# Altium PCB cw308_IMXRT1062.PcbDoc
Units mil, origin at the board's own origin, x right, y up, seen from the top; angles counter-clockwise.
Board outline 2055 x 2540 mil, 2 copper layers (Top Layer, Bottom Layer); 35 components, 41 nets, 351 pads, 68 vias.
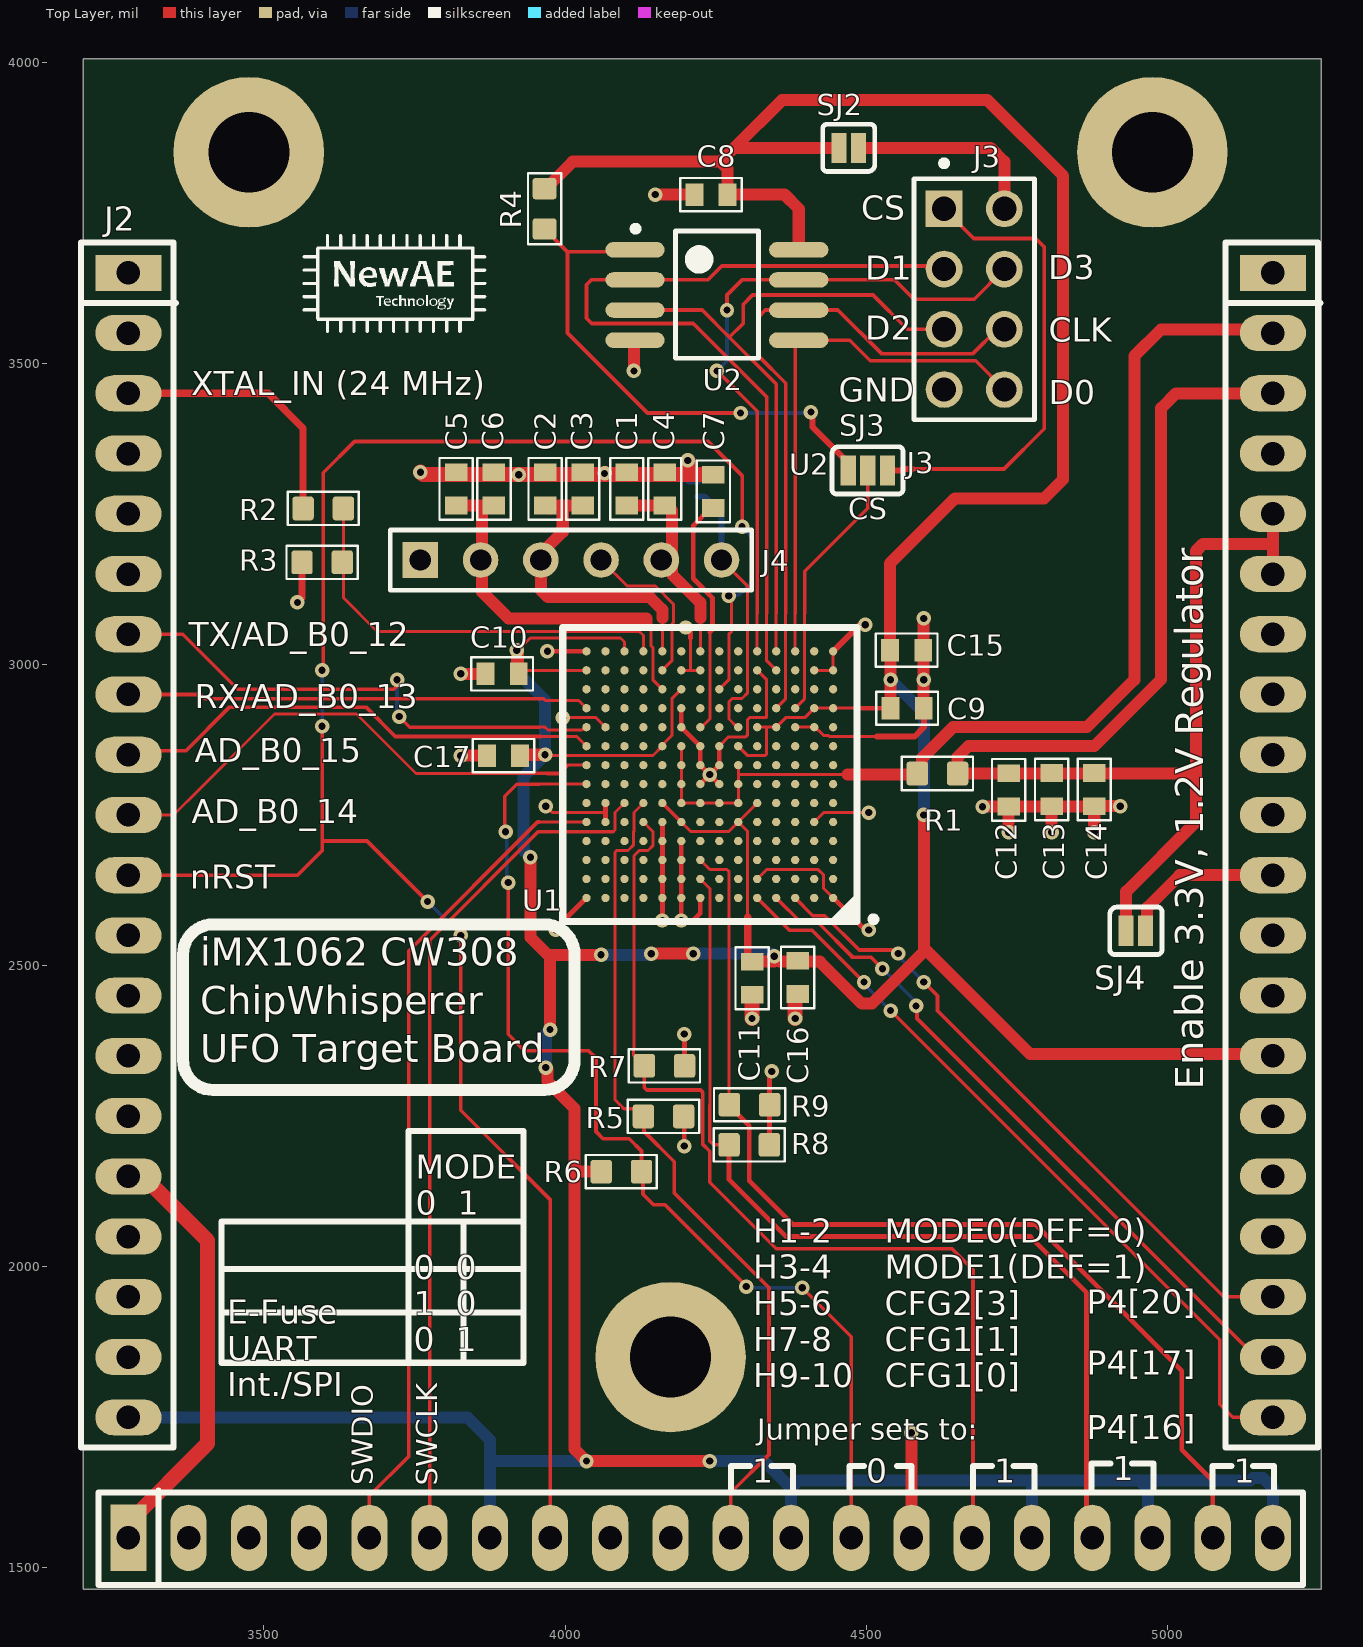
[diagram p0: Top Layer view]
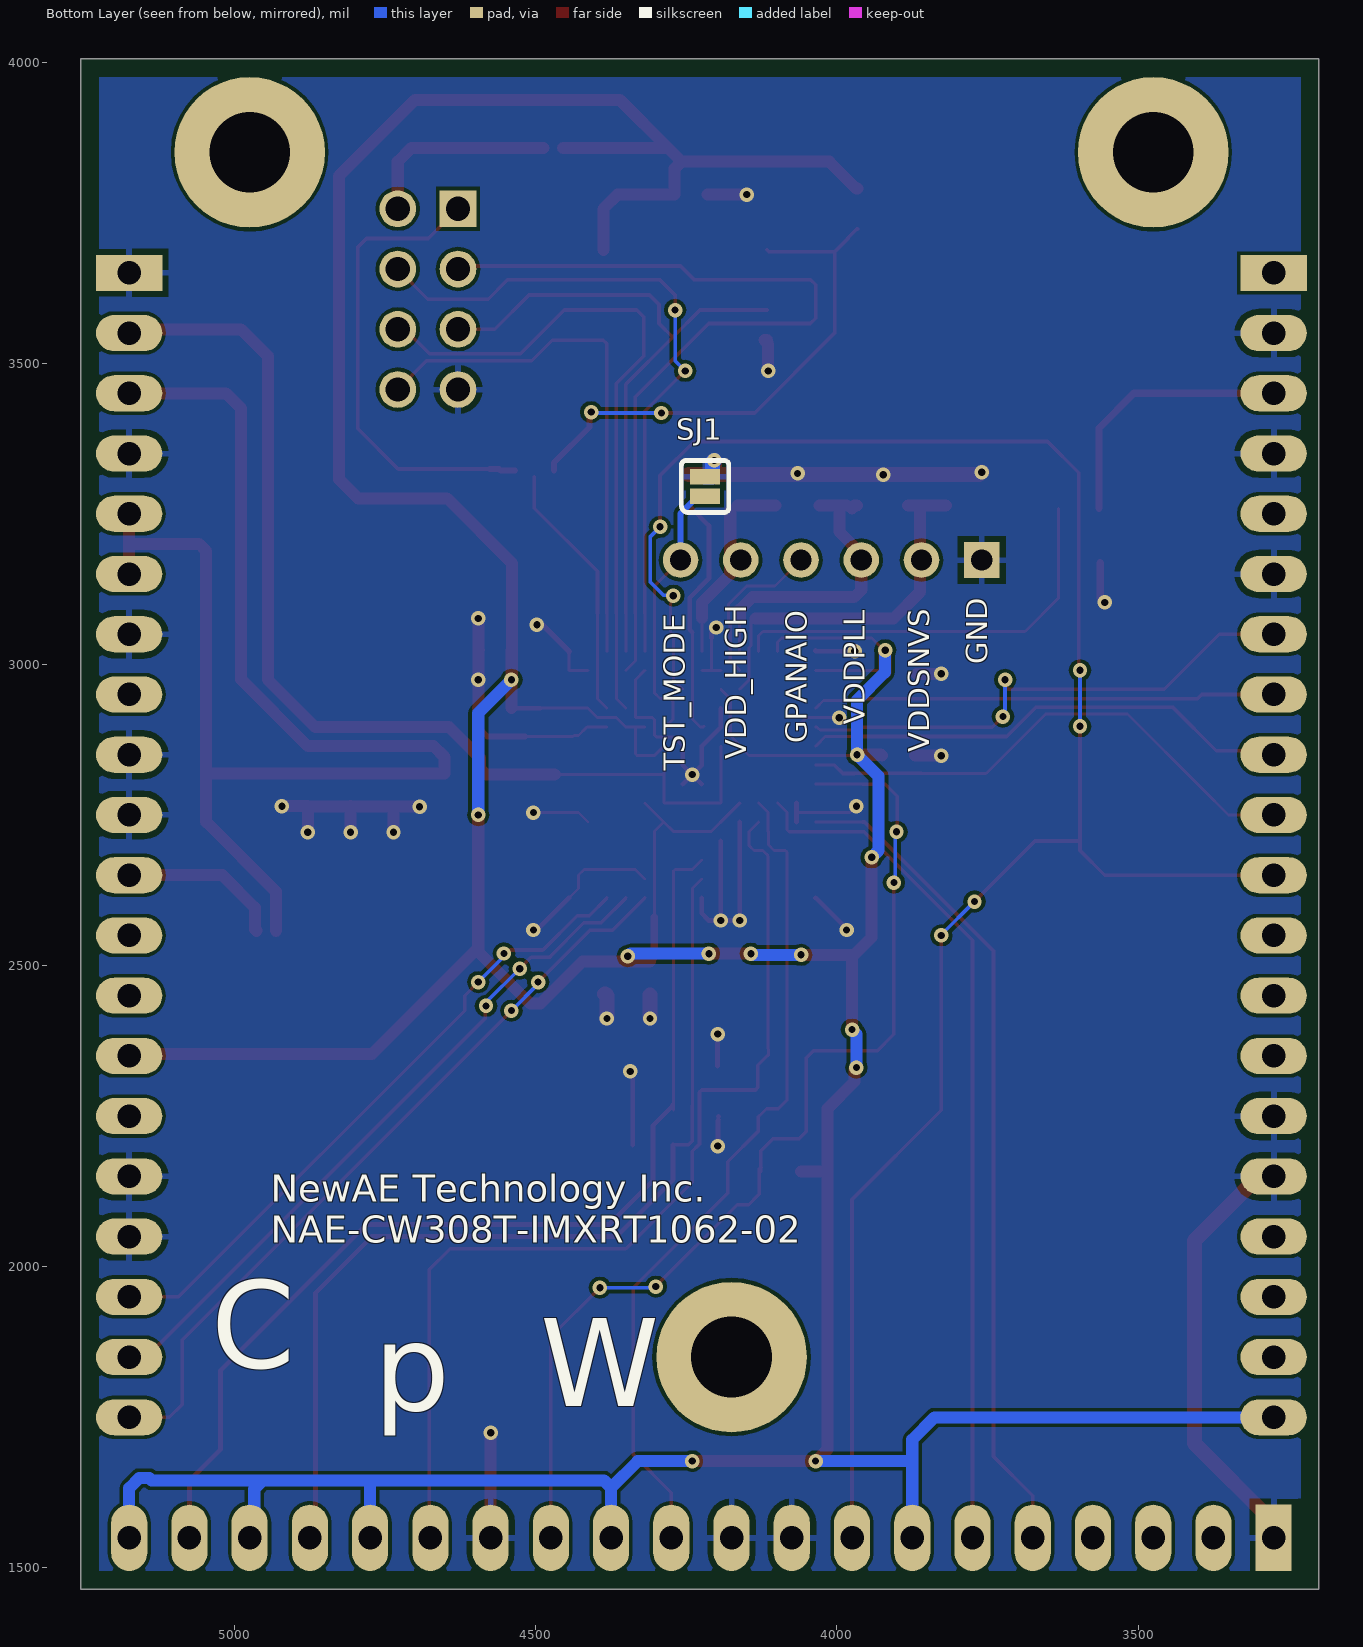
[diagram p1: Bottom Layer view, seen from below]

## Layer stack, top to bottom
Top Solder: solder mask 0.4, Solder Resist, Dk 3.5
Top Layer: signal copper 1.4
Dielectric 1: dielectric 12.6, FR-4, Dk 4.8
Bottom Layer: signal copper 1.4
Bottom Solder: solder mask 0.4, Solder Resist, Dk 3.5

## Board outline
3200,1465 5255,1465 5255,4005 3200,4005

## Design rules (kind name [scope] priority, off if disabled: settings)
BoardOutlineClearance Silk_to_Outline [(OnLayer('Top Overlay'))] p1: gap=0 ignorepadtopadclearanceinfootprint=FALSE
BoardOutlineClearance [All] p2: gap=30 ignorepadtopadclearanceinfootprint=FALSE
Clearance [All] p1: gap=6 ignorepadtopadclearanceinfootprint=FALSE
HoleSize [All] p1: absolutevalues=TRUE maxlimit=200 minlimit=1 maxpercent=80.000 minpercent=20.000
MinimumSolderMaskSliver [All] p1: minsoldermaskwidth=5
PlaneConnect PlaneConnect_viaDirect [IsVia] p1: planeconnectstyle=Direct reliefexpansion=20 reliefentries=4 reliefconductorwidth=10 reliefairgap=10
PlaneConnect [All] p2: planeconnectstyle=Relief reliefexpansion=20 reliefentries=4 reliefconductorwidth=10 reliefairgap=10
PolygonConnect PolygonConnect_viaDirect [All vs isVia] p1: connectstyle=Direct reliefconductorwidth=10 reliefentries=4 polygonreliefangle="90 Angle" airgapwidth=10
PolygonConnect [All] p2: connectstyle=Relief reliefconductorwidth=10 reliefentries=4 polygonreliefangle="90 Angle" airgapwidth=10
RoutingVias [All] p1: holewidth=12 width=24 viastyle="Through Hole" minholewidth=12 minwidth=24 maxholewidth=100 maxwidth=200
SilkToSilkClearance [All] p1: silktosilkclearance=5
SilkToSolderMaskClearance [IsPad] p1: minsilkscreentomaskgap=5 clearancetoexposedcopper=TRUE
SolderMaskExpansion [All] p1: expansion=4 istentingtop=FALSE
Width [All] p1: maxlimit=100 minlimit=5 preferedwidth=8 minimp=50.000000 maximp=50.000000 favimp=50.000000
25 further rules are at their usual default settings.

## Classes and differential pairs
component class CW308_IMXRT1062: C1 C2 C3 C4 C5 C6 C7 C8 C9 C10 C11 C15 C16 C17 J3 J4 R2 R3 R4 SJ1 SJ2 SJ3 U1 U2
component class CW308_IMXRT1062_UFO: C12 C13 C14 J2 R1 R5 R6 R7 R8 R9 SJ4

## Components (designator, comment, footprint, x,y, rotation, side; value= is the part's Value field where it differs from the comment)
C1 "100n" CAPC0603_M 4102.34,3291.45 r90 top
C2 "100n" CAPC0603_M 3966.63,3291.43 r90 top
C3 "2u2" CAPC0603_M 4029.11,3291.43 r90 top
C4 "2u2" CAPC0603_M 4165.34,3291.45 r90 top
C5 "100n" CAPC0603_M 3818.88,3291.45 r90 top
C6 "2u2" CAPC0603_M 3881.87,3291.45 r90 top
C7 "2u2" CAPC0603_M 4246.02,3287.38 r90 top
C8 "100n" CAPC0603_M 4242.1,3779.94 r180 top
C9 "100n" CAPC0603_M 4567.92,2927.22 r0 top
C10 "100n" CAPC0603_M 3895.44,2984.28 r180 top
C11 "100n" CAPC0603_M 4310.42,2478.93 r270 top
C12 "100n" CAPC0603_M 4736.2,2791.79 r270 top
C13 "2u2" CAPC0603_M 4807.55,2792.18 r270 top
C14 "2u2" CAPC0603_M 4878.41,2792.18 r270 top
C15 "2u2" CAPC0603_M 4566.92,3023.63 r0 top
C16 "2u2" CAPC0603_M 4385.84,2480.32 r270 top
C17 "100n" CAPC0603_M 3897.64,2848.47 r180 top
J2 "CW308_TARGETCON" CW308_TBOARD_CONN 3275,3650 r0 top locked
J3 "TSW-104-08-L-D" SMTC-TSW-104-08-L-D_V 4679.13,3606.3 r270 top
J4 "Header 6" HDR1X6 3759.66,3173.24 r0 top
R1 "1R0" RESC1608X55N 4618.09,2818.78 r0 top
R2 "100R" RESC1608X55N 3598.41,3258.88 r0 top
R3 "33R" RESC1608X55N 3596.52,3169.32 r180 top
R4 "10k" RESC1608X55N 3965.82,3756.32 r270 top
R5 "10k" RESC1608X55N 4163.3,2249.53 r0 top
R6 "10k" RESC1608X55N 4093.29,2157.86 r180 top
R7 "10k" RESC1608X55N 4164.84,2333.46 r0 top
R8 "10k" RESC1608X55N 4305.62,2202.34 r0 top
R9 "10k" RESC1608X55N 4306.08,2269 r180 top
SJ1 "NC" SJ_2S_NC 4218.94,3295.3 r90 bottom
SJ2 "NO" SJ_2S_NO 4470.76,3857.48 r180 top
SJ3 "NC" SJ_3S_NC12 4502.39,3322.06 r0 top
SJ4 "NC" SJ_2S_NC 4947.58,2557.76 r0 top
U1 "MIMXRT1062DVJ6A" BGA196C80P14X14_1200X1200X161 4240.15,2816.98 r180 top
U2 "IS25WP032D-JBLE" SOIC8_WIDE_NARROW 4251.96,3613.23 r0 top

## Footprints (in the part's own frame and the unit in brackets; to place one, negate y for a bottom-side part, rotate by r counter-clockwise, add the part's x,y. Pads: shape width x height; smd on the part's side, far side on the other; paste and mask are expansions set on the pad)
BGA196C80P14X14_1200X1200X161 [mm] "BGA, 196-Leads, Body 12.00x12.00mmx1.61mm, Pitch 0.80mm"
  round 0.35 smd: A1(-5.2,5.2) A2(-4.4,5.2) A3(-3.6,5.2) A4(-2.8,5.2) A5(-2,5.2) A6(-1.2,5.2) A7(-0.4,5.2) A8(0.4,5.2) A9(1.2,5.2) A10(2,5.2) A11(2.8,5.2) A12(3.6,5.2) A13(4.4,5.2) A14(5.2,5.2) B1(-5.2,4.4) B2(-4.4,4.4) B3(-3.6,4.4) B4(-2.8,4.4) B5(-2,4.4) B6(-1.2,4.4) B7(-0.4,4.4) B8(0.4,4.4) B9(1.2,4.4) B10(2,4.4) B11(2.8,4.4) B12(3.6,4.4) B13(4.4,4.4) B14(5.2,4.4) C1(-5.2,3.6) C2(-4.4,3.6) C3(-3.6,3.6) C4(-2.8,3.6) C5(-2,3.6) C6(-1.2,3.6) C7(-0.4,3.6) C8(0.4,3.6) C9(1.2,3.6) C10(2,3.6) C11(2.8,3.6) C12(3.6,3.6) C13(4.4,3.6) C14(5.2,3.6) D1(-5.2,2.8) D2(-4.4,2.8) D3(-3.6,2.8) D4(-2.8,2.8) D5(-2,2.8) D6(-1.2,2.8) D7(-0.4,2.8) D8(0.4,2.8) D9(1.2,2.8) D10(2,2.8) D11(2.8,2.8) D12(3.6,2.8) D13(4.4,2.8) D14(5.2,2.8) E1(-5.2,2) E2(-4.4,2) E3(-3.6,2) E4(-2.8,2) E5(-2,2) E6(-1.2,2) E7(-0.4,2) E8(0.4,2) E9(1.2,2) E10(2,2) E11(2.8,2) E12(3.6,2) E13(4.4,2) E14(5.2,2) F1(-5.2,1.2) F2(-4.4,1.2) F3(-3.6,1.2) F4(-2.8,1.2) F5(-2,1.2) F6(-1.2,1.2) F7(-0.4,1.2) F8(0.4,1.2) F9(1.2,1.2) F10(2,1.2) F11(2.8,1.2) F12(3.6,1.2) F13(4.4,1.2) F14(5.2,1.2) G1(-5.2,0.4) G2(-4.4,0.4) G3(-3.6,0.4) G4(-2.8,0.4) G5(-2,0.4) G6(-1.2,0.4) G7(-0.4,0.4) G8(0.4,0.4) G9(1.2,0.4) G10(2,0.4) G11(2.8,0.4) G12(3.6,0.4) G13(4.4,0.4) G14(5.2,0.4) H1(-5.2,-0.4) H2(-4.4,-0.4) H3(-3.6,-0.4) H4(-2.8,-0.4) H5(-2,-0.4) H6(-1.2,-0.4) H7(-0.4,-0.4) H8(0.4,-0.4) H9(1.2,-0.4) H10(2,-0.4) H11(2.8,-0.4) H12(3.6,-0.4) H13(4.4,-0.4) H14(5.2,-0.4) J1(-5.2,-1.2) J2(-4.4,-1.2) J3(-3.6,-1.2) J4(-2.8,-1.2) J5(-2,-1.2) J6(-1.2,-1.2) J7(-0.4,-1.2) J8(0.4,-1.2) J9(1.2,-1.2) J10(2,-1.2) J11(2.8,-1.2) J12(3.6,-1.2) J13(4.4,-1.2) J14(5.2,-1.2) K1(-5.2,-2) K2(-4.4,-2) K3(-3.6,-2) K4(-2.8,-2) K5(-2,-2) K6(-1.2,-2) K7(-0.4,-2) K8(0.4,-2) K9(1.2,-2) K10(2,-2) K11(2.8,-2) K12(3.6,-2) K13(4.4,-2) K14(5.2,-2) L1(-5.2,-2.8) L2(-4.4,-2.8) L3(-3.6,-2.8) L4(-2.8,-2.8) L5(-2,-2.8) L6(-1.2,-2.8) L7(-0.4,-2.8) L8(0.4,-2.8) L9(1.2,-2.8) L10(2,-2.8) L11(2.8,-2.8) L12(3.6,-2.8) L13(4.4,-2.8) L14(5.2,-2.8) M1(-5.2,-3.6) M2(-4.4,-3.6) M3(-3.6,-3.6) M4(-2.8,-3.6) M5(-2,-3.6) M6(-1.2,-3.6) M7(-0.4,-3.6) M8(0.4,-3.6) M9(1.2,-3.6) M10(2,-3.6) M11(2.8,-3.6) M12(3.6,-3.6) M13(4.4,-3.6) M14(5.2,-3.6) N1(-5.2,-4.4) N2(-4.4,-4.4) N3(-3.6,-4.4) N4(-2.8,-4.4) N5(-2,-4.4) N6(-1.2,-4.4) N7(-0.4,-4.4) N8(0.4,-4.4) N9(1.2,-4.4) N10(2,-4.4) N11(2.8,-4.4) N12(3.6,-4.4) N13(4.4,-4.4) N14(5.2,-4.4) P1(-5.2,-5.2) P2(-4.4,-5.2) P3(-3.6,-5.2) P4(-2.8,-5.2) P5(-2,-5.2) P6(-1.2,-5.2) P7(-0.4,-5.2) P8(0.4,-5.2) P9(1.2,-5.2) P10(2,-5.2) P11(2.8,-5.2) P12(3.6,-5.2) P13(4.4,-5.2) P14(5.2,-5.2)
  silkscreen extent -7.02,-6.2 6.2,6.22, body extent -6,-6 6,6, height 1.61
CAPC0603_M [mm]
  rect 0.75x0.95 smd: 1(-0.7,0) 2(0.7,0)
  silkscreen extent -1.3,-0.7 1.3,0.7, body extent -0.85,-0.45 0.85,0.45, height 0.9
CW308_TBOARD_CONN [mil]
  rect 110x60 hole 39: A1(0,0) C1(1900,0)
  oval 110x60 hole 39: A2(0,-100) A3(0,-200) A4(0,-300) A5(0,-400) A6(0,-500) A7(0,-600) A8(0,-700) A9(0,-800) A10(0,-900) A11(0,-1000) A12(0,-1100) A13(0,-1200) A14(0,-1300) A15(0,-1400) A16(0,-1500) A17(0,-1600) A18(0,-1700) A19(0,-1800) A20(0,-1900) C2(1900,-100) C3(1900,-200) C4(1900,-300) C5(1900,-400) C6(1900,-500) C7(1900,-600) C8(1900,-700) C9(1900,-800) C10(1900,-900) C11(1900,-1000) C12(1900,-1100) C13(1900,-1200) C14(1900,-1300) C15(1900,-1400) C16(1900,-1500) C17(1900,-1600) C18(1900,-1700) C19(1900,-1800) C20(1900,-1900)
  rect 60x110 hole 39: B1(0,-2100)
  oval 60x110 hole 39: B2(100,-2100) B3(200,-2100) B4(300,-2100) B5(400,-2100) B6(500,-2100) B7(600,-2100) B8(700,-2100) B9(800,-2100) B10(900,-2100) B11(1000,-2100) B12(1100,-2100) B13(1200,-2100) B14(1300,-2100) B15(1400,-2100) B16(1500,-2100) B17(1600,-2100) B18(1700,-2100) B19(1800,-2100) B20(1900,-2100)
  round 250 hole 134: MH1(200,200) MH2(900,-1800) MH2(1700,200)
  silkscreen extent -79,-2179 1979,50, body extent -50,-2149 1950,50, height 48
HDR1X6 [mm] "Connector; Header; 6 Position"
  rect 1.5x1.5 hole 0.9: 1(0,0)
  round 1.5 hole 0.9: 2(2.54,0) 3(5.08,0) 4(7.62,0) 5(10.16,0) 6(12.7,0)
  silkscreen extent -1.27,-1.27 13.97,1.27
RESC1608X55N [mm] "Chip Resistor, Body 1.6x0.8mm, EIA 0603, IPC Medium Density"
  round 0.254 on Mech15: 0(0,0)
  rrect25% 0.9x1 smd: 1(-0.85,0) 2(0.85,0)
  Top Layer pour cut-out: -0.6,0.5 0.6,0.5 0.6,-0.5 -0.6,-0.5
  silkscreen extent -1.5,-0.7 1.5,0.7, body extent -0.87,-0.47 0.88,0.48, height 0.54
SJ_2S_NC [mil] "Solder Jumper, closed with solder paste"
  rect 25x50 smd: 1(-16.22,0) 2(16.22,0)
  silkscreen extent -43,-39 43,39
SJ_2S_NO [mil] "Solder Jumper, open (no paste)"
  rect 25x50 smd paste-393.7: 1(-16.22,0) 2(16.22,0)
  silkscreen extent -43,-39 43,39
SJ_3S_NC12 [mil] "3-Way Solder Jumper, pads 1-2 closed"
  rect 25x50 smd: 1(-32.43,0) 2(0,0)
  rect 25x50 smd paste-393.7: 3(32.44,0)
  silkscreen extent -60,-39 59,39
SMTC-TSW-104-08-L-D_V [mm] "CONN, 8-Leads, Body 10.16x5.08mm, Pitch 2.54mm"
  rect 1.55x1.55 hole 1.02: 1(-3.81,-1.27)
  round 1.55 hole 1.02: 2(-3.81,1.27) 3(-1.27,-1.27) 4(-1.27,1.27) 5(1.27,-1.27) 6(1.27,1.27) 7(3.81,-1.27) 8(3.81,1.27)
  silkscreen extent -5.85,-2.54 5.08,2.54, body extent -5.08,-2.54 5.08,2.54, height 8.38
SOIC8_WIDE_NARROW [mm] "SOIC, 8-Leads, Body 5.28x5.28mm, Pitch 1.27mm, NOT IPC - Fits Narrow+Wide"
  oval 2.5x0.65 smd: 1(-3.45,1.905) 2(-3.45,0.635) 3(-3.45,-0.635) 4(-3.45,-1.905) 5(3.45,-1.905) 6(3.45,-0.635) 7(3.45,0.635) 8(3.45,1.905)
  silkscreen extent -3.55,-2.67 1.75,2.92, body extent -3.95,-2.7 3.95,2.7, height 2.16

## Part data
C1 C2 C5 C8 C9 C10 C11 C12 C17: library part CCHIP-100n-0603, "100n, 0603", Case-EIA=0603, Case-Metric=1608, Manufacture 1=Kemet, Manufacture Part Number 1=C0603C104K5RACTU, Rated Voltage=50VDC, Supplier Part Number 1=399-5089-2-ND, Component Group=Capacitor, Component Type=Standard, Mounting Technology=SMT, Part Number=CCHIP-100n-0603, Pin Count=2, Supplier 1=Digi-Key
C3 C4 C6 C7 C13 C14 C15 C16: library part CCHIP-2u2-0603, "2u2, 0603", Case-EIA=0603, Case-Metric=1608, Manufacture 1=Samsung, Manufacture Part Number 1=CL10B225KP8NNNC, Rated Voltage=10VDC, Supplier Part Number 1=1276-1134-2-ND, Component Group=Capacitor, Component Type=Standard, Mounting Technology=SMT, Part Number=CCHIP-2u2-0603, Pin Count=2, Supplier 1=Digi-Key
J2: library part CW308_TBOARD, "CW308 \"Standard\" Target Board Connector", Component Group=Mechanical, Component Type=Standard, Mounting Technology=Through-hole, Part Number=CW308_TBOARD, Pin Count=60, Pitch=2.54mm
J3: library part CMP-1681-00006-4, "Male Header, Pitch 2.54 mm, 2 x 4 Position, Height 8.38 mm, Tail Length 5.08 mm, -55 to 125 degC, RoHS, Bulk", Colour=Black, Current Rating="7.6 A", Manufacturer=Samtec, Package Quantity=1, Voltage Rating="550 V", ComponentLink1Description="Manufacturer URL", ComponentLink1URL=http://www.samtec.com/, ComponentLink2Description=Datasheet, ComponentLink2URL=https://datasheet.ciiva.com/25616/0900766b81154476-25616879.pdf, ComponentLink3Description="Package Specification", ComponentLink3URL=http://suddendocs.samtec.com/prints/tsw-xxx-xx-x-x-xx-xxx-footprint.pdf, Contact Finish=Gold, Contact Material=Bronze, Contact Plating=Gold, DatasheetVersion=04/2012, Lead Pitch="0.1 inch", Mount="Through Hole", Mounting Technology="Through Hole", PackageDescription="Male Header, Pitch 2.54 mm, 2 x 4 Position, Height 8.38 mm, Tail Length 5.08 mm", PackageReference=TSW-104-08-L-D, Packaging=Bulk, Pins=8, REACH SVHC="No SVHC", RoHSCompliant=true, Rows=2
J4: "Header, 6-Pin", LatestRevisionDate=17-Jul-2002, LatestRevisionNote="Re-released for DXP Platform.", Publisher="Altium Limited"
R1: library part RCHIP-1R0-0603, "1R0 res, 0603, 1%, 1/10W", Case-EIA=0603, Case-Metric=1608, Manufacture 1=Yageo, Manufacture Part Number 1=RC0603FR-071RL, Rated Power=0.1W, Rated Voltage=75VDC, Supplier Part Number 1=311-1.00HRCT-ND, Temperature Range="-55C to 155C", Tolerance=1%, Component Group=Resistor, Component Type=Standard, Mounting Technology=SMT, Part Number=RCHIP-1R0-0603, Pin Count=2, Supplier 1=Digi-Key
R2: library part RCHIP-100R-0603, "100R res, 0603, 1%, 1/10W", Case-EIA=0603, Case-Metric=1608, Manufacture 1=Yageo, Manufacture Part Number 1=RC0603FR-07100RL, Rated Power=0.1W, Rated Voltage=75VDC, Supplier Part Number 1=311-100HRCT-ND, Temperature Range="-55C to 155C", Tolerance=1%, Component Group=Resistor, Component Type=Standard, Mounting Technology=SMT, Part Number=RCHIP-100R-0603, Pin Count=2, Supplier 1=Digi-Key
R3: library part RCHIP-33R-0603, "33R res, 0603, 1%, 1/10W", Case-EIA=0603, Case-Metric=1608, Manufacture 1=Yageo, Manufacture Part Number 1=RC0603FR-0733RL, Rated Power=0.1W, Rated Voltage=75VDC, Supplier Part Number 1=311-33.0HRCT-ND, Temperature Range="-55C to 155C", Tolerance=1%, Component Group=Resistor, Component Type=Standard, Mounting Technology=SMT, Part Number=RCHIP-33R-0603, Pin Count=2, Supplier 1=Digi-Key
R4 R5 R6 R7 R8 R9: library part RCHIP-10K-0603, "10k res, 0603, 1%, 1/10W", Case-EIA=0603, Case-Metric=1608, Manufacture 1=Yageo, Manufacture Part Number 1=RC0603FR-0710KL, Rated Power=0.1W, Rated Voltage=75VDC, Supplier Part Number 1=311-10.0KHRCT-ND, Temperature Range="-55C to 155C", Tolerance=1%, Component Group=Resistor, Component Type=Standard, Mounting Technology=SMT, Part Number=RCHIP-10K-0603, Pin Count=2, Supplier 1=Digi-Key
SJ1 SJ4: library part SJ_2S, "Solder Jumper, NC", Component Group="PCB Feature", Component Type="Standard (No BOM)", Mounting Technology=COPPER, Part Number=SJ_2S, Pin Count=2
SJ2: library part SJ_2S_NO, "Solder Jumper, NO", Component Group="PCB Feature", Component Type="Standard (No BOM)", Mounting Technology=COPPER, Part Number=SJ_2S_NO, Pin Count=2
SJ3: library part SJ_3S_12JMP, "Solder Jumper, NC", Component Group="PCB Feature", Component Type="Standard (No BOM)", Mounting Technology=COPPER, Part Number=SJ_3S_12JMP, Pin Count=3
U1: "NXP Cross-Over iMX Microcontroller", Manufacture 1=NXP, Supplier Part Number 1=568-15307-ND, Component Group="Digital IC", Component Type=Standard, Manufacture Part Number 1=MIMXRT1062DVJ6A, Mounting Technology=SMT, Part Number=MIMXRT1062DVJ6A, Pin Count=196, PP Material Stack=0, PP Rotation=0, RoHS=Yes, Supplier 1=Digi-Key
U2: "32MB QPI/QPI/QSPI 8-PIN SOP 208M", Manufacture 1=ISSI, Supplier Part Number 1=706-1615-ND, Component Group="Digital IC", Component Type=Standard, Manufacture Part Number 1=IS25WP032D-JBLE, Mounting Technology=SMT, Part Number=IS25WP032D-JBLE, Pin Count=8, Pitch=1.27mm, RoHS=Yes, Supplier 1=Digi-Key

## Via types
v1: diameter 24, hole 12, Top Layer to Bottom Layer, tented both sides, 68 vias

## Nets (pads, with @x,y where several pads share a name; then routed paths per layer and width w, separated by ;. In a path a pad name is that pad's centre, name@x,y a point inside that pad or via, vN(x,y) a via of type N, cw(c..) or ccw(c..) an arc to the next point about the centre after c; other vN are vias at no path point)
BOOT_CFG1_0: J2.B19 R9.2 U1.C8 | length 1738.9
  Top Layer w5: U1.C8 4240.15,2659.5 4268.71,2659.5 4271.64,2656.57 R9.2@4271.64,2259.84
  Top Layer w8: R9.2 4272.62,2267.03 4305.62,2234.02 4305.62,2142.53 4377.98,2070.17 4780.5,2070.17 5023.62,1827.05 5023.62,1696.38 5075,1645 J2.B19
BOOT_CFG1_1: J2.B17 R8.1 U1.B8 | length 1615.9
  Top Layer w5: U1.B8 4240.15,2628.01 4240.15,2267.7
  Top Layer w6: 4240.15,2267.7 4240.15,2208.76 4246.57,2202.34 R8.1
  Top Layer w8: R8.1 4272.16,2144.56 4366.72,2050 4772.49,2050 4865.6,1956.88 4865.6,1559.4 J2.B17
BOOT_CFG2_3_INF_LOOP: J2.B15 R7.1 U1.E11 | length 1674.5
  Top Layer w5: U1.E11 4145.66,2722.5 4145.66,2699.05 4137.61,2691 4122.99,2691 4114.16,2682.17 4114.16,2362.19 4113.81,2361.83 4113.81,2351.03 4114.73,2351.03 4131.38,2334.39 R7.1
  Top Layer w6: R7.1 4131.38,2297.48 4135.41,2293.45 4224.63,2293.45 4228.15,2289.93 4228.15,2203.79 4240.15,2191.79 4240.15,2140.06 4350.38,2029.83 4642.21,2029.83 4677.14,1994.9 4677.14,1552.14 J2.B15
BOOT_MODE0: J2.B11 R5.1 U1.F11 | length 1394
  Top Layer w5: R5.1 4117.08,2262.28 4097.39,2262.28 4082.67,2277.01 4082.67,2688.07 4085.6,2691 4104.43,2691 4113.81,2700.37 4113.81,2722.14 4114.16,2722.5 4114.16,2753.99 U1.F11
  Top Layer w6: R5.1 4130.96,2248.4 4130.96,2224.36 4181.1,2174.22 4181.1,2122.28 4338.35,1965.04 4338.35,1688.35 4275,1625 J2.B11
BOOT_MODE1: J2.B13 R6.1 U1.G14 | length 1775.6
  Top Layer w5: 3956.68,2801.24 U1.G14
  Top Layer w6: v1(3901.14,2722.05) 3899.87,2723.32 3899.87,2781.3 3919.81,2801.24 3956.68,2801.24 ; v1(3905.51,2637.8) 3905.51,2385.83 3933.07,2358.27 4039.37,2358.27 4051.18,2346.46 4051.18,2224.41 4062.99,2212.6 4106.3,2212.6 4126.76,2192.14 R6.1@4126.76,2164.58 ; R6.1@4125.98,2165.35 R6.1@4126.76,2164.58 ; R6.1 R6.1@4126.76,2164.58 ; v1(4300.68,1967.01) 4300.68,1968.1 4165.68,2103.1 4146.65,2103.1 4129.27,2120.48 4129.27,2162.07 R6.1@4126.76,2164.58 ; v1(4393.47,1965.25) 4475,1883.72 J2.B13
  Top Layer w20: J2.B13 J2.B13@4476.67,1551.67
  Bottom Layer w6: v1(3901.14,2722.05) 3903.32,2719.87 3903.32,2639.98 v1(3905.51,2637.8) ; v1(4300.68,1967.01) 4302.44,1965.25 v1(4393.47,1965.25)
CLKIN: J2.A3 R2.1 | length 447.2
  Top Layer w12: J2.A3 3507.09,3450 3564.95,3392.15 R2.1
CS: J2.A18
FLEXSPI_CLK: J3.6 U1.L4 U2.6 | length 1134.5
  Top Layer w5: U1.L4 4366.13,2942.97 4366.13,3084.7
  Top Layer w6: 4366.13,3084.7 4366.13,3466.54 4320.86,3511.81 4320.86,3576.77 4332.31,3588.23 U2.6 4452.75,3588.23 4525.04,3515.94 4676.98,3515.94 4717.35,3556.3 J3.6
FLEXSPI_D0: J3.8 U1.P3 U2.5 | length 894.2
  Top Layer w5: U1.P3 4381.88,3084.7
  Top Layer w6: 4381.88,3084.7 4381.88,3532.32 U2.5 4472.46,3538.23 4506.75,3503.94 4681.5,3503.94 J3.8
FLEXSPI_D1: J3.3 U1.N4 U2.2 | length 1477.9
  Top Layer w5: 4334.63,3084.7 4334.63,3005.96 U1.N4
  Top Layer w6: 4334.63,3084.7 4334.63,3444.01 4212.81,3565.83 4044.39,3565.83 4035.42,3574.8 4035.42,3630.26 4043.39,3638.23 U2.2 4236.65,3638.23 4259.84,3661.42 4624.02,3661.42 J3.3
FLEXSPI_D2: J3.5 U1.P4 U2.3 | length 1161.9
  Top Layer w5: U1.P4 4350.38,3084.7
  Top Layer w6: U2.3 4227.47,3588.23 4272.61,3543.09 ; 4268.71,3546.99 4272.61,3543.09 ; 4350.38,3084.7 4350.38,3465.32 4272.61,3543.09 ; J3.5 4568.13,3556.3 4511.2,3613.23 4311.18,3613.23 4295.49,3597.53 4295.49,3565.98 4272.61,3543.09
FLEXSPI_D3: J3.4 U1.P5 U2.7 | length 1130.9
  Top Layer w5: U1.P5 4318.89,3084.7
  Top Layer w6: v1(4251.96,3487.24) 4318.89,3420.32 4318.89,3084.7 ; v1(4268.71,3588.23) 4268.71,3613.23 4293.71,3638.23 U2.7 4547.21,3638.23 4579.13,3606.3 4679.13,3606.3 J3.4
  Bottom Layer w6: v1(4251.96,3487.24) 4268.71,3504 v1(4268.71,3588.23)
FLEXSPI_SS0: SJ3.2 U1.L3 | length 434.3
  Top Layer w5: U1.L3 4397.63,2942.97 4397.63,3084.7
  Top Layer w6: 4397.63,3084.7 4397.63,3154.38 4502.58,3259.33 SJ3.2@4502.58,3311.51
GND: C1.2 C2.2 C3.2 C4.2 C5.2 C6.2 C7.2 C8.2 C9.2 C10.2 C11.2 C12.2 C13.2 C14.2 C15.2 C16.2 C17.2 J2.A2 J2.A4 J2.A6 J2.A15 J2.A16 J2.B1 J2.B9 J2.B10 J2.B14 J2.C1 J2.C4 J2.C7 J2.C9 J2.C10 J2.C16 J2.C17 J3.7 J4.1 R3.2 R5.2 R7.2 R8.2 R9.1 SJ1.2 U1.A1 U1.A8 U1.A9 U1.A10 U1.A14 U1.B5 U1.B9 U1.B10 U1.C9 U1.C10 U1.D9 U1.D10 U1.E2 U1.E10 U1.E13 U1.F13 U1.G7 U1.G8 U1.H7 U1.H8 U1.J7 U1.J8 U1.K2 U1.K3 U1.K9 U1.K13 U1.L9 U1.N1 U1.N2 U1.N5 U1.N8 U1.N9 U1.P1 U1.P14 U2.4 | length 4603.9
  Top Layer w5: v1(3967.79,2764.62) 3978.42,2753.99 4066.92,2753.99 ; v1(3996.05,2911.47) 4051.17,2911.47 U1.K13 ; U1.N9 4208.29,2990.21 ; 4208.29,3043.75 4208.29,2990.21 ; U1.N8 4208.29,2990.21 ; U1.J7 4271.29,2879.62 4299.8,2879.62 4303.14,2882.96 4303.14,2908.54 4306.07,2911.47 4334.63,2911.47 4334.63,2974.47 U1.N5 ; U1.B5 4334.28,2659.14 4420.14,2659.14 4429.12,2650.16 4429.12,2628.01 U1.A1 ; U1.K3 U1.K2 4415.29,2895.72 4429.12,2881.89 4436.94,2881.89 4438.5,2880.33 4518.13,2880.33 4519.69,2881.89 4521.24,2880.33 ; U1.E2 4429.12,2753.99 v1(4503.94,2753.99) ; U1.N2 U1.N1 U1.P1
  Top Layer w8: v1(3970.57,3021.71) U1.P14 U1.P14@4035.42,3023.27 ; v1(3984.03,2559.06) 3984.03,2560.87 U1.A14 ; U1.E13 4066.92,2753.99 U1.F13 ; U1.E10 U1.D10 U1.C10 U1.B10 U1.A10 v1(4161.41,2574.8) v1(4192.9,2574.8) ; U1.D9 U1.C9 U1.B9 U1.A9 v1(4192.9,2574.8) ; U1.L9 U1.K9 U1.J8 U1.H8 v1(4240.15,2816.98) ; R5.2@4196.48,2249.25 R5.2 ; R5.2@4196.85,2244.09 4197.72,2243.22 v1(4197.72,2200.36) ; v1(4197.75,2386.2) 4198.31,2385.65 R7.2 ; v1(4200.41,3061.22) 4208.29,3053.33 4208.29,3043.75 ; U1.A8 4224.4,2586.6 4212.6,2574.8 v1(4192.9,2574.8) ; U1.G8 v1(4240.15,2816.98) ; U1.G7 v1(4240.15,2816.98) ; U1.J7 U1.H7 v1(4240.15,2816.98) ; R8.2 4339.09,2320.3 v1(4343.11,2324.32) ; U1.A1 4498.08,2559.06 v1(4503.94,2559.06)
  Top Layer w10: U1.P1 4488.91,3065.75 v1(4498.08,3065.75) ; 4518.13,2880.33 4521.24,2880.33 4580.09,2880.33 4595.48,2895.72 C9.2 v1(4595.48,2974.46)
  Top Layer w12: v1(3555.52,3102.77) 3563.06,3110.3 R3.2
  Top Layer w20: v1(3826.77,2848.47) C17.2 ; v1(3826.77,2984.28) C10.2 ; v1(4114.16,3487.24) 4114.16,3531.98 4120.41,3538.23 U2.4 ; v1(4149.69,3779.94) C8.2 ; v1(4574.8,1724.41) 4575,1724.21 J2.B14 ; C9.2 4594.98,2927.71 4594.98,3023.14 C15.2 4594.98,3024.13 4594.98,3075.87 v1(4595.48,3076.36) ; v1(4692.91,2763.78) 4693.36,2764.23 C12.2 ; v1(4736.2,2721.26) C12.2 ; v1(4807.55,2721.26) C13.2@4807.55,2764.42 ; C13.2 C13.2@4807.55,2764.42 ; v1(4878.41,2721.26) C14.2 ; v1(4921.38,2764.62) C14.2 ; C12.2 4736.39,2764.42 C13.2@4807.55,2764.42 ; C13.2@4807.55,2764.42 4878.22,2764.42 C14.2
  Top Layer w25: J2.B1 3275,1575 3406.45,1706.45 3406.45,2043.55 3300,2150 J2.A16 ; v1(3759.66,3319.01) 3763.73,3314.93 v1(3923,3314.93) v1@4063.47,3314.93 ; v1(4065.48,3316.94) v1@4063.47,3314.93 ; v1(4203.61,3338.6) 4203.61,3314.93 ; C7.2 4203.61,3314.93 ; v1(4310.42,2412.07) C11.2 ; v1(4381.88,2412.07) 4381.88,2450.5 4384.14,2452.76 C16.2 ; v1@4063.47,3314.93 4203.61,3314.93
  Bottom Layer w25: v1(4203.61,3338.6) 4206.44,3335.77 4206.44,3311.51 SJ1.2
GPANAIO: J4.4 U1.N10 | length 268
  Top Layer w5: J4.4 4102.9,3130 4149.91,3130 4179.91,3100 4179.91,3069.16 4177.16,3066.41 4177.16,3005.96 U1.N10
GPIO1_TX: J2.A7 U1.K14 | length 881.2
  Top Layer w5: 3956.68,2895.72 3966.63,2895.72 3971.38,2890.97 4028.3,2890.97 4033.05,2895.72 U1.K14
  Top Layer w6: J2.A7 3365.41,3050 3456.69,2958.72 3715.69,2958.72 3720.95,2963.97 v1(3720.95,2974.46) ; v1(3724.41,2913.37) 3742.06,2895.72 3956.68,2895.72
  Bottom Layer w6: v1(3720.95,2974.46) 3720.95,2916.84 v1(3724.41,2913.37)
GPIO2_RX: J2.A8 U1.L14 | length 769.9
  Top Layer w5: 3964.32,2942.97 3967.14,2940.14 4022.5,2940.14 U1.L14
  Top Layer w6: J2.A8 3394.54,2950 3401.57,2942.97 3964.32,2942.97
GPIO3: J2.A9 U1.J14 | length 820.1
  Top Layer w5: 3959.66,2880.33 3966.46,2880.33 3966.83,2879.97 4019.68,2879.97 U1.J14
  Top Layer w6: J2.A9 3281.77,2856.77 3370.5,2856.77 3442.86,2929.13 3669.29,2929.13 3718.09,2880.33 3959.66,2880.33
GPIO4: J2.A10 U1.H14 | length 876.6
  Top Layer w5: J2.A10 3350,2750 3394.54,2794.54 3517.63,2917.63 3653.54,2917.63 3752.24,2818.94 3859.66,2818.94 ; 4003.93,2832.73 U1.H14
  Top Layer w6: 3859.66,2818.94 3970.41,2818.94 3970.57,2818.78 3989.97,2818.78 4003.93,2832.73
LED1: J2.C18 U1.A3 | length 1084.7
  Top Layer w6: U1.A3 4411.22,2582.92 4431.02,2582.92 4488.18,2525.77 4542.18,2525.77 4547.95,2520 v1(4552.82,2520) ; v1(4595.48,2472.56) 4618.09,2449.94 4618.09,2425.2 5093.29,1950 J2.C18
  Bottom Layer w6: v1(4552.82,2520) 4552.82,2515.22 v1(4595.48,2472.56)
LED2: J2.C19 U1.A4 | length 1155.9
  Top Layer w6: U1.A4 4391.72,2570.92 4420.14,2570.92 4476.18,2514.88 4476.18,2513.77 4507.84,2513.77 v1(4526.78,2494.83) ; v1(4582.68,2433.07) 4584.19,2431.56 4584.19,2412.07 5146.26,1850 J2.C19
  Bottom Layer w6: v1(4526.78,2494.83) 4582.68,2438.93 v1(4582.68,2433.07)
LED3: J2.C20 U1.A5 | length 1278
  Top Layer w6: U1.A5 4372.23,2558.92 4409.57,2558.92 4495.93,2472.56 v1(4496.17,2472.56) ; v1(4540.35,2425.2) 5086.61,1878.94 5086.61,1771.65 5108.27,1750 J2.C20
  Bottom Layer w6: v1(4496.17,2472.56) 4496.17,2469.38 v1(4540.35,2425.2)
MISO: J2.A13
MOSI: J2.A14
NetC7_1: C7.1 U1.K8 | length 407.6
  Top Layer w5: U1.K8@4220.47,2897.64 4222.34,2895.77 4226.48,2895.77 4240.15,2909.44 4240.15,3053.2
  Top Layer w8: 4240.15,3053.2 4244.4,3057.46 4244.4,3110.73 4212.6,3142.53 4212.6,3230.33 4242.09,3259.82 C7.1
NetJ2_C11: J2.C11 SJ4.2 | length 270.4
  Top Layer w20: SJ4.2 4966.29,2560.26 4966.29,2596.07 5020.22,2650 J2.C11
NetJ3_1: J3.1 SJ3.3 | length 778.5
  Top Layer w6: 4581.04,3324.29 4728.59,3324.29 4795.28,3390.98 4795.28,3692.91 4781.14,3707.05 4678.39,3707.05 J3.1
  Top Layer w10: SJ3.3 4558.75,3322.06 4560.98,3324.29 4576.26,3324.29
NetJ3_2: J3.2 SJ2.1 | length 330
  Top Layer w20: SJ2.1 4706.29,3857.48 4729.13,3834.65 J3.2
NetR2_2: R2.2 R3.1 U1.P11 | length 698.5
  Top Layer w5: R2.2 3631.88,3185.05 3631.88,3110.44 3687.57,3054.75 4122.99,3054.75 4129.91,3047.84 U1.P11
NetR4_2: R4.2 SJ3.1 U2.1 | length 885.1
  Top Layer w6: R4.2 3967.02,3722.85 3981.63,3708.24 3981.63,3707.05 4003.93,3684.75 ; U2.1 4112.65,3684.75 4003.93,3684.75 ; v1(4291.34,3417.32) 4136.6,3417.32 4003.93,3550 4003.93,3684.75
  Top Layer w10: v1(4408.07,3418.82) 4410.75,3416.14 4410.75,3393.77 4469.96,3334.56 SJ3.1
  Bottom Layer w6: v1(4291.34,3417.32) 4406.58,3417.32 v1(4408.07,3418.82)
nRST: J2.A11 J2.B8 U1.M7 | length 3460.7
  Top Layer w5: U1.M7 4271.64,2974.46 4271.64,3050 4276.4,3054.75 4276.4,3101.65 4275.28,3102.77 4275.28,3110.44 v1(4271.64,3114.08)
  Top Layer w6: J2.A11 3555.52,2650 3596.52,2691 3596.52,2706.75 ; v1(3596.52,2897.13) 3596.52,2706.75 ; v1(3596.52,2990.21) 3598.41,2992.1 3598.41,3318.04 3650.45,3370.08 4237.07,3370.08 4293.71,3313.44 v1(4293.71,3228.35) ; v1(3771.65,2606.3) 3671.21,2706.75 3596.52,2706.75 ; v1(3826.77,2550) 3826.77,2259.84 3975,2111.61 J2.B8
  Bottom Layer w6: v1(3596.52,2897.13) v1(3596.52,2990.21) ; v1(3771.65,2606.3) 3826.77,2551.18 v1(3826.77,2550) ; v1(4271.64,3114.08) 4272.58,3115.02 4288.4,3115.02 4309.66,3136.27 4309.66,3212.4 v1(4293.71,3228.35)
SCK: J2.A12
SHUNTH: C12.1 C13.1 C14.1 J2.C3 J2.C5 J2.C6 R1.2 SJ4.1 | length 2371.5
  Top Layer w20: SJ4.1 4931.36,2622.75 5047.24,2738.64 5047.24,2818.78 ; J2.C6 5175,3200 ; J2.C5 5175,3200 ; J2.C3 5014.18,3450 4989.37,3425.2 4989.37,2975.19 4878.41,2864.23 4669.44,2864.23 4651.55,2846.34 R1.2 5047.24,2818.78 ; 5047.24,2818.78 5047.24,3188.28 5058.96,3200 5175,3200
SWD_CLK: J2.B6 U1.F12 | length 1426.7
  Top Layer w5: 3956.68,2722.14 4079.74,2722.14 4082.67,2725.07 4082.67,2753.99 U1.F12
  Top Layer w6: J2.B6 3775,2542.07 3955.07,2722.14 3956.68,2722.14
SWD_DIO: J2.B5 U1.E14 | length 1385.1
  Top Layer w5: 3956.68,2738.24 U1.E14
  Top Layer w6: J2.B5 3675,1619.88 3740.16,1685.04 3740.16,2524.19 3954.21,2738.24 3956.68,2738.24
TEST_MODE: J4.6 SJ1.1 U1.K6 | length 455.5
  Top Layer w5: J4.6 4303.14,3129.76 4303.14,2952.7 4293.77,2943.33 4277.25,2943.33 4272,2938.07 4272,2909.44 4285.72,2895.72 U1.K6
  Bottom Layer w10: SJ1.1 4231.44,3279.08 4259.66,3250.86 J4.6
VCC: C8.1 C9.1 C10.1 C11.1 C15.1 C16.1 C17.1 J2.A20 J2.B7 J2.B12 J2.B16 J2.B18 J2.B20 J2.C14 R4.1 R6.2 SJ2.2 U1.E6 U1.E9 U1.F5 U1.F10 U1.J6 U1.J10 U1.K4 U1.K5 U1.L1 U1.L2 U1.M9 U1.N14 U1.P12 U2.8 | length 9857
  Top Layer w5: C10.1 C10.1@3928.93,2990.21 ; v1(3966.63,2850) 3967.79,2848.84 4146.02,2848.84 U1.J10 4161.41,2866.14 4177.16,2881.89 4177.16,2942.97 U1.M9 ; U1.N14 C10.1@3928.93,2990.21 ; U1.P12 4098.42,3037.18 4091.84,3043.75 3942.2,3043.75 3928.93,3030.48 C10.1@3928.93,2990.21 ; U1.E9 4208.29,2722.85 4272,2722.85 U1.E6 ; U1.J6 4303.15,2848.47 4331.7,2848.47 4334.63,2851.4 4334.63,2895.72 ; 4303.14,2580.76 4303.14,2722.5 U1.E6 ; U1.F5 U1.E6 ; U1.K5 4334.64,2895.72 ; 4492.12,2927.22 U1.L1 U1.L2 4397.63,2911.47 4366.13,2911.47 U1.K4 4334.64,2895.72
  Top Layer w6: U1.F10 U1.E9
  Top Layer w8: 4492.12,2927.22 C9.1 v1(4540.35,2974.46)
  Top Layer w12: 4303.14,2580.76 4303.14,2513.77 C11.1
  Top Layer w20: v1(3919.81,3023.63) 3919.81,2987.48 C10.1 ; C17.1 3926.73,2850 v1(3966.63,2850) ; v1(3942.33,2679.7) 3942.33,2546.82 3971.38,2517.77 ; R4.1 3967.79,3789.78 4012.66,3834.65 4257.94,3834.65 ; v1(3967.79,2330.71) 3970.57,2327.93 3970.57,2307.73 4015.75,2262.55 4015.75,1696.99 v1(4035.42,1677.32) v1(4240.15,1677.32) ; v1(3975,2393.7) 3975,2514.15 3971.38,2517.77 ; 4019.68,2157.48 4020.07,2157.86 R6.2 ; v1(4059.66,2517.77) 3971.38,2517.77 ; v1(4142.91,2519.68) v1(4212.6,2519.68) ; C11.1 v1@4347.22,2506.49 ; v1(4347.22,2515.58) 4356.31,2506.49 4422.65,2506.49 4492.49,2436.65 4509.06,2436.65 4595.48,2523.07 ; U2.8 4387.79,3756.3 4364.15,3779.94 C8.1 4269.66,3822.93 4257.94,3834.65 ; SJ2.2 4280.78,3857.48 ; C9.1 v1(4540.35,2974.46) 4539.86,2974.96 4539.86,3023.14 C15.1 4539.37,3167.84 4647.12,3275.59 4795.28,3275.59 4826.77,3307.09 4826.77,3811.02 4700.79,3937.01 4360.3,3937.01 4280.78,3857.48 ; v1(4595.48,2750) 4595.48,2523.07 ; J2.C14 5172.16,2352.84 4772.16,2352.84 4601.93,2523.07 4595.48,2523.07 ; 4257.94,3834.65 4280.78,3857.48
  Bottom Layer w20: J2.A20 3838,1750 3875,1713 3875,1677.32 ; J2.B7 3875,1677.32 ; v1(3919.81,3023.63) 3920.57,3022.87 3920.57,2986.71 3966.63,2940.66 v1(3966.63,2850) 3931.11,2814.48 3931.11,2690.93 v1(3942.33,2679.7) ; v1(3967.79,2330.71) 3967.79,2386.49 v1(3975,2393.7) ; v1(4035.42,1677.32) 3875,1677.32 ; v1(4059.66,2517.77) 4140.99,2517.77 v1(4142.91,2519.68) ; v1(4212.6,2519.68) 4343.11,2519.68 v1(4347.22,2515.58) ; v1(4240.15,1677.32) 4330.97,1677.32 4375,1633.28 ; J2.B12 4375,1633.28 ; v1(4540.35,2974.46) 4595.48,2919.34 v1(4595.48,2750) ; J2.B16 4775,1639 4769,1645 ; J2.B18 4967.35,1557.65 4967.35,1630.92 4953.26,1645 ; J2.B20 5175,1632.48 5158.28,1649.19 5141.72,1649.19 5137.52,1645 4953.26,1645 ; 4375,1633.28 4386.72,1645 4582.68,1645 4769,1645 ; 4769,1645 4953.26,1645
VDD_HIGH: C1.1 C4.1 J4.5 U1.P8 | length 316
  Top Layer w5: U1.P8 4224.4,3076.83
  Top Layer w20: C1.1 C4.1 ; C4.1@4177.16,3255.17 4177.16,3149.69 4224.4,3102.45 4224.4,3076.83
VDDPLL: C2.1 C3.1 J4.3 U1.P10 | length 495.7
  Top Layer w5: U1.P10 4161.41,3076.83
  Top Layer w20: C2.1 3970.57,3263.88 C2.1@3975.33,3259.11 ; C2.1@3984.03,3263.88 3992.13,3263.88 ; 3992.13,3263.93 3992.13,3263.88 ; C3.1 3996.05,3263.88 ; 4161.41,3076.83 4161.41,3090.65 4140.56,3111.5 3971.4,3111.5 3959.66,3123.24 J4.3 3959.66,3183.81 3996.05,3220.21 3996.05,3263.88 ; 3992.13,3263.88 3996.05,3263.88
VDDSNVS: C5.1 C6.1 J4.2 U1.M10 | length 623.9
  Top Layer w5: 4142.91,3076.83 4142.91,3030.48 4145.66,3027.72 4145.66,2974.46 U1.M10
  Top Layer w20: C5.1 3862.2,3263.89 ; C6.1 3862.2,3263.89 ; 4135.41,3076.36 3905.98,3076.36 3862.2,3120.14 3862.2,3263.89
VDDSOC: J2.C2 R1.1 U1.F6 U1.F7 U1.F8 U1.F9 U1.G6 U1.G9 U1.H6 U1.H9 U1.J9 | length 1773.6
  Top Layer w5: U1.J9 U1.H9 U1.G9 U1.F9 U1.F8 U1.F7 U1.F6 U1.G6 4287.39,2816.98 ; U1.H6 4287.39,2816.98 ; 4468.5,2816.98 4287.39,2816.98
  Top Layer w20: 4468.5,2816.98 4582.83,2816.98 R1.1 4592.34,2826.49 4592.34,2844.21 4643.85,2895.72 4866.14,2895.72 4944.88,2974.46 4944.88,3511.81 4989.37,3556.3 5168.7,3556.3 J2.C2
pads on no net: J2.A1 J2.A5 J2.A17 J2.A19 J2.B2 J2.B3 J2.B4 J2.C8 J2.C12 J2.C13 J2.C15 J2.MH1 J2.MH2 R1.0 R2.0 R3.0 R4.0 R5.0 R6.0 R7.0 R8.0 R9.0 U1.A2 U1.A6 U1.A7 U1.A11 U1.A12 U1.A13 U1.B1 U1.B2 U1.B3 U1.B4 U1.B6 U1.B7 U1.B11 U1.B12 U1.B13 U1.B14 U1.C1 U1.C2 U1.C3 U1.C4 U1.C5 U1.C6 U1.C7 U1.C11 U1.C12 U1.C13 U1.C14 U1.D1 U1.D2 U1.D3 U1.D4 U1.D5 U1.D6 U1.D7 U1.D8 U1.D11 U1.D12 U1.D13 U1.D14 U1.E1 U1.E3 U1.E4 U1.E5 U1.E7 U1.E8 U1.E12 U1.F1 U1.F2 U1.F3 U1.F4 U1.F14 U1.G1 U1.G2 U1.G3 U1.G4 U1.G5 U1.G10 U1.G11 U1.G12 U1.G13 U1.H1 U1.H2 U1.H3 U1.H4 U1.H5 U1.H10 U1.H11 U1.H12 U1.H13 U1.J1 U1.J2 U1.J3 U1.J4 U1.J5 U1.J11 U1.J12 U1.J13 U1.K1 U1.K7 U1.K10 U1.K11 U1.K12 U1.L5 U1.L6 U1.L7 U1.L8 U1.L10 U1.L11 U1.L12 U1.L13 U1.M1 U1.M2 U1.M3 U1.M4 U1.M5 U1.M6 U1.M8 U1.M11 U1.M12 U1.M13 U1.M14 U1.N3 U1.N6 U1.N7 U1.N11 U1.N12 U1.N13 U1.P2 U1.P6 U1.P7 U1.P9 U1.P13
copper on no net: | length 28.1
  Top Layer w20: 5146.85,2950 5175,2950

## Polygon pours and split planes (outlines as drawn)
GND on Bottom Layer "GND_L02_P000" (solid, pour order 0): 3125,4070 3160,4105 5330,4105 5330,1530 5160,1360 3055,1360

## Silkscreen, mask and mechanical layers (free items; w line width, h text height)
Top Overlay:
  drawing of 59 lines, arcs and shapes, not listed
  text "CS" at 4491.62,3737.77 h40
  text "D3" at 4802.1,3639.17 h40
  text "D1" at 4498.08,3638.23 h40
  text "D2" at 4498.18,3538.77 h40
  text "CLK" at 4803.15,3536.01 h40
  text "XTAL_IN (24 MHz)" at 3379.26,3446.4 h40
  text "GND" at 4454.55,3435.68 h40
  text "D0" at 4803.15,3431.45 h40
  text "J3" at 4567.18,3305.71 h60
  text "U2" at 4372.12,3303.02 h60
  text "CS" at 4470.12,3229.63 h60
  text "TX/AD_B0_12" at 3375.41,3030.48 h40
  text "RX/AD_B0_13" at 3385.41,2926.78 h40
  text "AD_B0_15" at 3385.41,2837.57 h40
  text "AD_B0_14" at 3380.5,2736.53 h40
  text "nRST" at 3377.94,2627.57 h40
  text "iMX1062 CW308 / ChipWhisperer / UFO Target Board" at 3394.54,2323.69 h80
  text "Enable 3.3V, 1.2V Regulator" at 5075,2293.45 h80 r90
  text "MODE / 0  1" at 3752.24,2086.31 h40
  text "P4[20]" at 4865.6,1921.88 h40
  text "0  0 / 1  0 / 0  1" at 3748.61,1859.4 h40
  text "P4[17]" at 4865.6,1821 h40
  text "H1-2 / H3-4 / H5-6 / H7-8 / H9-10" at 4312.46,1799.81 h40
  text "MODE0(DEF=0) / MODE1(DEF=1) / CFG2[3] / CFG1[1] / CFG1[0]" at 4530.4,1799.81 h40
  text "E-Fuse / UART / Int./SPI" at 3438.69,1785.07 h40
  text "P4[16]" at 4865.6,1713.69 h40
  text "Jumper sets to:" at 4318.9,1700.79 h60
  text "1" at 4909.45,1645.67 h40
  text "1" at 4311.02,1641.73 h40
  text "0" at 4500,1641.73 h40
  text "1" at 4712.6,1641.73 h40
  text "1" at 5110.24,1641.73 h40
  text "SWDIO" at 3692.44,1637.32 h60 r90
  text "SWCLK" at 3799.09,1636.75 h60 r90
Bottom Overlay:
  text "GND" at 3738.81,3000.59 h60 r270
  text "VDDPLL" at 3942.39,2899.71 h60 r270
  text "GPANAIO" at 4038.18,2868.88 h60 r270
  text "VDDSNVS" at 3834.89,2854.16 h60 r270
  text "VDD_HIGH" at 4139,2842.25 h60 r270
  text "TST_MODE" at 4241.09,2823.75 h60 r270
  text "NewAE Technology Inc. / NAE-CW308T-IMXRT1062-02" at 4940,2040 h45
  text "C" at 5039,1783 h250
  text "W" at 4492.49,1720.21 h250
  text "p" at 4769,1713 h250
Mechanical 1:
  the board outline again, w10